# Altium PCB robotcar.PcbDoc (part 1 of 3)
Units mil, origin at the board's own origin, x right, y up, seen from the top; angles counter-clockwise.
Board outline 4050.03 x 1712.03 mil, 2 copper layers (Top Layer, Bottom Layer); 124 components, 123 nets, 485 pads, 136 vias.
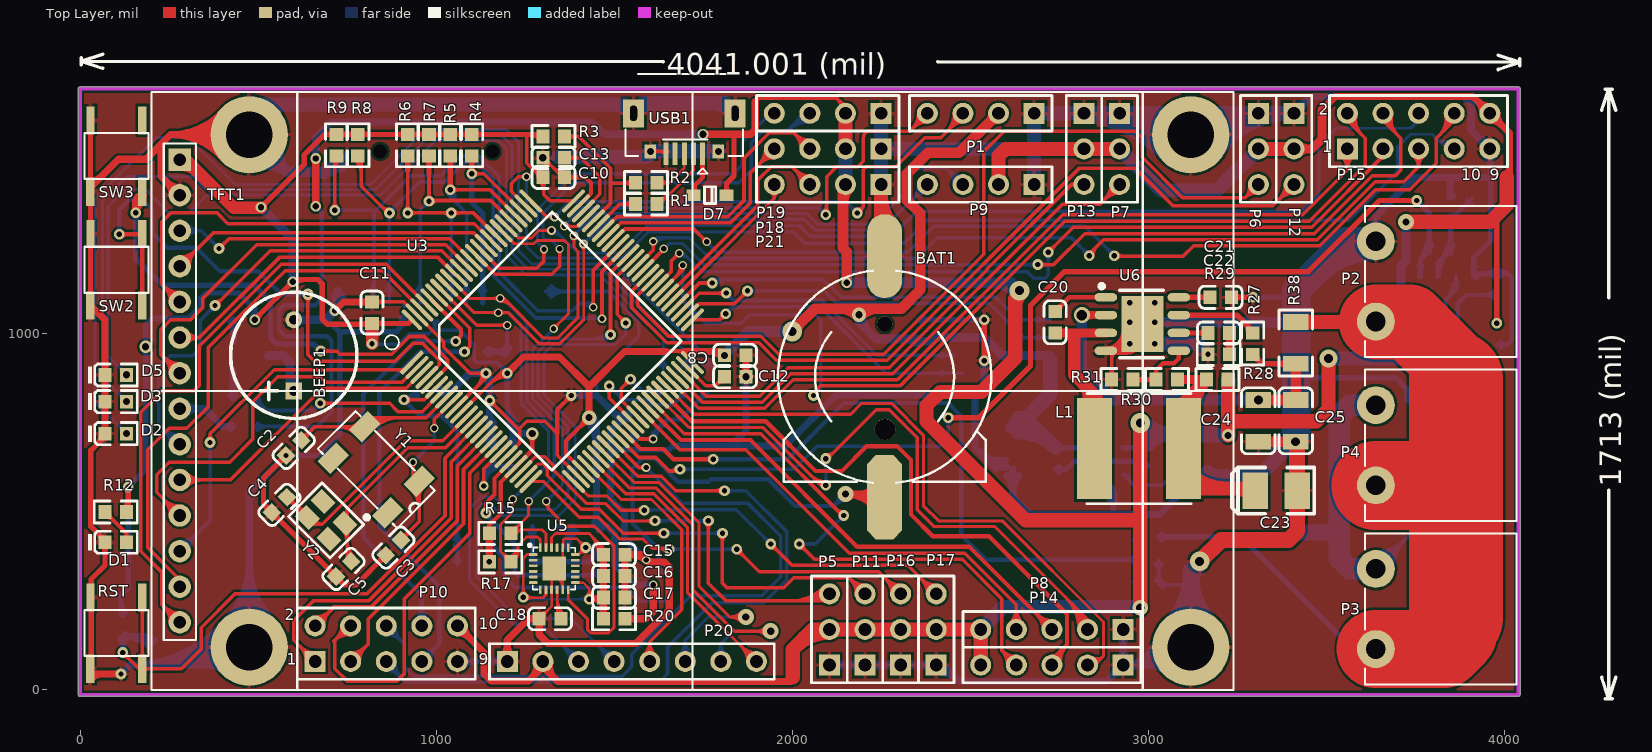
[diagram p0: Top Layer view]
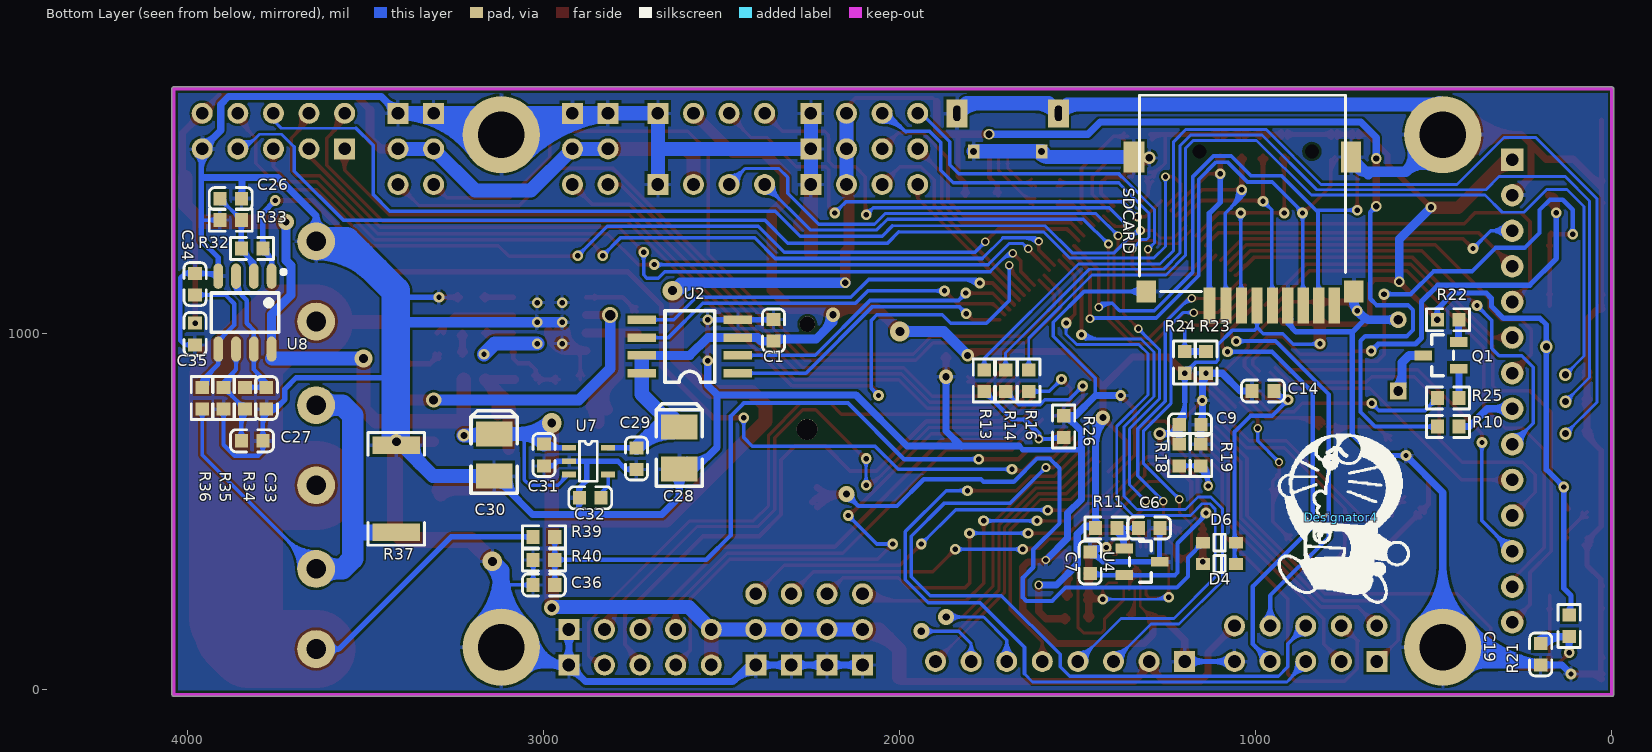
[diagram p1: Bottom Layer view, seen from below]

## Layer stack, top to bottom
Top Layer: signal copper 1.4
Dielectric: dielectric 12.6, FR-4, Dk 4.8
Bottom Layer: signal copper 1.4

## Board outline
-5.01,-13 ccw(c0,-13) 0,-18.02 4040,-18.02 ccw(c4040,-13) 4045.01,-13 4045.01,1689 ccw(c4040,1689) 4040,1694.02 0,1694.02 ccw(c0,1689) -5.01,1689

## Design rules (kind name [scope] priority, off if disabled: settings)
Clearance [All] p1: gap=7
ComponentClearance [All] p1: gap=10 collisioncheckmode=3 verticalgap=10
HoleSize [All] p1: absolutevalues=TRUE maxlimit=200 minlimit=7 maxpercent=80.000 minpercent=20.000
PolygonConnect [All] p1: connectstyle=Relief reliefconductorwidth=10 reliefentries=4 polygonreliefangle="90 Angle"
RoutingVias [All] p1: holewidth=10 width=20 viastyle="Through Hole" minholewidth=1 minwidth=2 maxholewidth=200 maxwidth=100
SolderMaskExpansion [All] p1: expansion=4
TestPointUsage [All] p1: valid=0 allowmultiple=FALSE
Testpoint [All] p1: side=15 testpointundercomponent=TRUE minsize=40 maxsize=100 preferedsize=60 minholesize=0 maxholesize=40 preferedholesize=32 testpointgrid=1 style=1023 order=0-112345678
Width [All] p1: maxlimit=500 minlimit=7 preferedwidth=10 minimp=50.000000 maximp=50.000000 favimp=50.000000
17 further rules are at their usual default settings.

## Classes and differential pairs
component class U_socket: P5 P6 P7 P8 P9 P10 P11 P12 P13 P14 P15 P16 P17 P18 P19 P20 P21
component class U_power: C20 C21 C22 C23 C24 C25 C26 C27 C28 C29 C30 C31 C32 C33 C34 C35 C36 L1 P2 P3 P4 R27 R28 R29 R30 R31 R32 R33 R34 R35 R36 R37 R38 R39 R40 U6 U7 U8
component class U_mcu: BAT1 BEEP1 C1 C2 C3 C4 C5 C6 C7 C8 C9 C10 C11 C12 C13 C14 C15 C16 C17 C18 C19 D1 D2 D3 D4 D5 D6 D7 P1 Q1 R1 R2 R3 R4 R5 R6 R7 R8 R9 R10 R11 R12 R13 R14 R15 R16 R17 R18 R19 R20 R21 R22 R23 R24 R25 R26 RST SDCARD SW2 SW3 TFT1 U2 U3 U4 U5 USB1 Y1 Y2

## Components (designator, comment, footprint, x,y, rotation, side; value= is the part's Value field where it differs from the comment)
BAT1 "BATT" BATM 2260,880 r0 top locked
BEEP1 "BEEP" BELL-5 600,840 r90 top
C1 "100nF (104) 10% 50V" 0603_C 2355,1010 r90 bottom
C2 "10pF" 0603_C 600,680 r45 top
C3 "10pF" 0603_C 880,400 r45 top
C4 "10pF" 0603_C 560,520 r45 top
C5 "10pF" 0603_C 740,340 r45 top
C6 "470nF" 0603_C 1300,455 r0 bottom
C7 "100nF" 0603_C 1465.59,357.87 r270 bottom
C8 "100nF (104) 10% 50V" 0603_C 1840,940 r0 top
C9 "100nF (104) 10% 50V" 0603_C 1185,745 r180 bottom
C10 "100nF (104) 10% 50V" 0603_C 1330,1440 r0 top
C11 "100nF (104) 10% 50V" 0603_C 820,1060 r90 top
C12 "100nF (104) 10% 50V" 0603_C 1840,880 r180 top
C13 "100nF (104) 10% 50V" 0603_C 1330,1495 r0 top
C14 "1uF (105) 10% 50V" 0603_C 980,840 r180 bottom
C15 "10uF" 0603_C 1500,380 r180 top
C16 "100nF" 0603_C 1500,320 r180 top
C17 "100nF" 0603_C 1500,260 r180 top
C18 "100nF" 0603_C 1320,200 r0 top
C19 "1uF (105) 10% 50V" 0603_C 200,100 r90 bottom
C20 "10nF" 0603_C 2739,1033 r270 top
C21 "100nF 50V" 0603_C 3204,1103 r180 top
C22 "3.3nF" 0603_C 3199,1003 r0 top
C23 "100uF" CASE-B_3528 3360,560 r180 top
C24 "10uF" 1206_C 3309.76,756.06 r90 top
C25 "10uF" 1206_C 3414.76,756.06 r90 top
C26 "100nF" 0603_C 3880,1380 r0 bottom
C27 "100nF" 0603_C 3820,700 r180 bottom
C28 "100uF (107) ±10% 6.3V" CASE-B_3528 2620,680 r90 bottom
C29 "100nF (104) 10% 50V" 0603_C 2740,650 r90 bottom
C30 "100uF (107) ±10% 6.3V" CASE-B_3528 3140,660 r90 bottom
C31 "100nF (104) 10% 50V" 0603_C 3000,660 r270 bottom
C32 "100nF (104) 10% 50V" 0603_C 2870,540 r180 bottom
C33 "100nF" 0603_C 3780,820 r90 bottom
C34 "100nF" 0603_C 3980,1140 r270 bottom
C35 "100nF" 0603_C 3980,1000 r270 bottom
C36 "100nF (104) 10% 50V" 0603_C 3000,295 r0 bottom
D1 "白灯 0603" 0603_LED_S1 100,415 r0 top
D2 "红灯 0603" 0603_LED_S1 100,720 r0 top
D3 "绿灯 0603" 0603_LED_S1 100,810 r0 top
D4 "1N4148WS T4" SOD-323 1102,354 r0 bottom
D5 "蓝灯 0603" 0603_LED_S1 100,885 r0 top
D6 "1N4148WS T4" SOD-323 1102,414 r0 bottom
D7 "1N4148WS T4" SOD-323 1770,1390 r180 top
Designator4 "Comment" jiqimao2 760,485 r180 bottom
L1 "10uH" L_SOP74 2849,678 r0 top
P1 "Header 4,SWD" HDR1X4 2680,1620 r180 top
P2 "Header 2" HT508R 3640,1260 r270 top
P3 "Header 2" HT508R 3640,340 r270 top locked
P4 "Header 2" HT508R 3640,800 r270 top locked
P5 "Header 3" HDR1X3 2105,70 r90 top
P6 "Header 3" HDR1X3 3310,1620 r270 top
P7 "Header 3" HDR1X3 2920,1620 r270 top
P8 "Header 5" HDR1X5 2930,170 r180 top
P9 "Header 4" HDR1X4 2680,1420 r180 top
P10 "Header 5X2" HDR2X5 660,80 r0 top locked
P11 "Header 3" HDR1X3 2205,70 r90 top
P12 "Header 3" HDR1X3 3410,1620 r270 top
P13 "Header 3" HDR1X3 2820,1620 r270 top
P14 "Header 5" HDR1X5 2930,70 r180 top
P15 "Header 5X2" HDR2X5 3560,1520 r0 top
P16 "Header 3" HDR1X3 2305,70 r90 top
P17 "Header 3" HDR1X3 2405,70 r90 top
P18 "Header 4" HDR1X4 2250,1520 r180 top
P19 "Header 4" HDR1X4 2250,1620 r180 top
P20 "Header 8" HDR1X8 1200,80 r0 top
P21 "Header 4" HDR1X4 2250,1420 r180 top
Q1 "SS8550 Y2" SOT-23(SOT-23-3) 480,940 r180 bottom
R1 "22Ω (22R0) ±1%" 0603_R 1590,1365 r180 top
R2 "22Ω (22R0) ±1%" 0603_R 1590,1425 r180 top
R3 "4.7KΩ (4701) ±1%" 0603_R 1330,1555 r0 top
R4 "10KΩ (1002) ±1%" 0603_R 1100,1530.31 r270 top
R5 "10KΩ (1002) ±1%" 0603_R 1040,1530.31 r270 top
R6 "10KΩ (1002) ±1%" 0603_R 920,1530.31 r270 top
R7 "10KΩ (1002) ±1%" 0603_R 980,1530.31 r270 top
R8 "10KΩ (1002) ±1%" 0603_R 780,1530.31 r270 top
R9 "10KΩ (1002) ±1%" 0603_R 720,1530.31 r270 top
R10 "100Ω" 0603_R 460,740 r180 bottom
R11 "0Ω" 0603_R 1420,455 r180 bottom
R12 "1.2KΩ (1201) ±1%" 0603_R 100,500 r0 top
R13 "1.2KΩ (1201) ±1%" 0603_R 1763,869 r270 bottom
R14 "1.2KΩ (1201) ±1%" 0603_R 1703,869 r270 bottom
R15 "10KΩ" 0603_R 1180,440 r0 top
R16 "1.2KΩ (1201) ±1%" 0603_R 1638,869 r270 bottom
R17 "10KΩ" 0603_R 1180,360 r0 top
R18 "0Ω (0R0) ±1%" 0603_R 1215,660 r270 bottom
R19 "0Ω (0R0) ±1%" 0603_R 1155,660 r270 bottom
R20 "10Ω (10R0) ±1%" 0603_R 1500,200 r0 top
R21 "10KΩ (1002) ±1%" 0603_R 120,180 r90 bottom
R22 "4.7Ω (4R70) ±1%" 0603_R 460,1040 r0 bottom
R23 "10KΩ (1002) ±1%" 0603_R 1140,920 r270 bottom
R24 "0Ω (0R0) ±1%" 0603_R 1200,920 r270 bottom
R25 "1.2KΩ (1201) ±1%" 0603_R 460,820 r180 bottom
R26 "10KΩ (1002) ±1%" 0603_R 1540,740 r90 bottom
R27 "100KΩ (1003) ±1%" 0603_R 3294,973 r270 top
R28 "0Ω (0R0) ±1%" 0603_R 3195,872 r0 top
R29 "6.8KΩ (6801) ±1%" 0603_R 3198.69,943 r180 top
R30 "47KΩ (4702) ±1%" 0603_R 3053,872 r0 top
R31 "10KΩ (1002) ±1%" 0603_R 2928,872 r0 top
R32 "20KΩ" 0603_R 3820,1240 r180 bottom
R33 "10KΩ" 0603_R 3880,1320 r0 bottom
R34 "91KΩ" 0603_R 3840,820 r270 bottom
R35 "10KΩ" 0603_R 3900,820 r90 bottom
R36 "1.2KΩ (1201) ±1%" 0603_R 3960,820 r270 bottom
R37 "0.01Ω" 2512_R 3415,565 r90 bottom
R38 "0Ω" 1206_R 3415,975 r90 top
R39 "33KΩ (3302) ±1%" 0603_R 3000,430 r0 bottom
R40 "10KΩ (1002) ±1%" 0603_R 3000,365 r180 bottom
RST "3*4 key" KEY-SMT 102,160 r270 top (schematic designator SW1)
SDCARD "SD" TF 1083.94,1076.54 r90 bottom locked (schematic designator CN1)
SW2 "3*4 key" KEY-SMT 102,1180 r270 top
SW3 "3*4 key" KEY-SMT 102,1500 r270 top
TFT1 "TFT 2.4'' module" "TFT 2.4'' module" 1720,840 r270 top locked
U2 "W25Q128" SOIC-8 2455,889.94 r0 bottom
U3 "STM32F103VC/ET6" LQFP-100 1326.08,979.85 r45 top locked
U4 "REF3125" SOT-23(SOT-23-3) 1320,360 r0 bottom
U5 "MPU9250" QFN24-t 1273.07,380.31 r0 top
U6 "MP2307" SOIC-8_EP_150mil 2984,1028 r270 top
U7 "SPX3819" SOT25-5 2930.24,680 r180 bottom
U8 "LM358" SOIC-8_150mil 3840,1060 r0 bottom
USB1 "USB-5P" USB-MICRO_B 1697.28,1620 r180 top locked
Y1 "32.768KHz" MC-306 832.01,618.9 r135 top
Y2 "25MHZ" SMD-3225_4P 691.07,476.37 r135 top

## Footprints (in the part's own frame and the unit in brackets; to place one, negate y for a bottom-side part, rotate by r counter-clockwise, add the part's x,y. Pads: shape width x height; smd on the part's side, far side on the other; paste and mask are expansions set on the pad)
0603_C [mm]
  rect 0.93x0.98 smd: 1(-0.77,0) 2(0.77,0)
  silkscreen extent -1.53,-0.79 1.54,0.79, body extent -0.8,-0.4 0.8,0.4, height 0.3
0603_LED_S1 [mm]
  rect 0.93x0.98 smd: A(0.77,0) K(-0.77,0)
  silkscreen extent -1.97,-0.79 1.54,0.79, body extent -0.8,-0.4 0.8,0.4, height 0.6
0603_R [mm]
  rect 0.93x0.98 smd: 1(-0.77,0) 2(0.77,0)
  silkscreen extent -1.53,-0.79 1.54,0.79, body extent -0.85,-0.4 0.85,0.4, height 0.56
1206_C [mm]
  rect 1.13x1.8 smd: 1(-1.49,0) 2(1.49,0)
  silkscreen extent -2.36,-1.2 2.35,1.2, body extent -1.6,-0.81 1.6,0.79, height 1
1206_R [mm]
  rect 1.13x1.8 smd: 1(-1.49,0) 2(1.49,0)
  silkscreen extent -2.36,-1.2 2.35,1.2, body extent -1.7,-0.86 1.65,0.87, height 0.85
2512_R [mm]
  rect 1.25x3.42 smd: 1(-3.1,0) 2(3.1,0)
  silkscreen extent -4.03,-2.01 4.02,2.01, body extent -3.16,-1.6 3.16,1.6, height 0.62
BATM [mm]
  round 1.1 hole 1.1 unplated: 0(0,3.748)
  round 1.5 hole 1.5 unplated: 0(0.025,-3.752)
  oct 2.5x6 smd: 1(0,-8.602)
  oval 2.5x6 smd: 2(0,8.598)
  silkscreen extent -7.62,-7.58 7.62,7.57
BELL-5 [mm]
  rect 1.2x1.2 hole 0.7: 1(0,0)
  round 1.2 hole 0.7: 2(5.08,0)
  silkscreen extent -1.97,-4.51 7.05,4.51
CASE-B_3528 [mm]
  rect 1.8x2.6 smd: 1(1.5,0) 2(-1.5,0)
  silkscreen extent -2.73,-1.65 3.16,1.65, body extent -1.85,-1.47 1.85,1.46, height 2.03
HDR1X3 [mm] "Connector; Header; 3 Position"
  rect 1.5x1.5 hole 0.9: 1(0,0)
  round 1.5 hole 0.9: 2(2.54,0) 3(5.08,0)
  silkscreen extent -1.27,-1.27 6.35,1.27
HDR1X4 [mm] "Connector; Header; 4 Position"
  rect 1.5x1.5 hole 0.9: 1(0,0)
  round 1.5 hole 0.9: 2(2.54,0) 3(5.08,0) 4(7.62,0)
  silkscreen extent -1.27,-1.27 8.89,1.27
HDR1X5 [mm] "Connector; Header; 5 Position"
  rect 1.5x1.5 hole 0.9: 1(0,0)
  round 1.5 hole 0.9: 2(2.54,0) 3(5.08,0) 4(7.62,0) 5(10.16,0)
  silkscreen extent -1.27,-1.27 11.43,1.27
HDR1X8 [mm] "Connector; Header; 8 Position"
  rect 1.5x1.5 hole 0.9: 1(0,0)
  round 1.5 hole 0.9: 2(2.54,0) 3(5.08,0) 4(7.62,0) 5(10.16,0) 6(12.7,0) 7(15.24,0) 8(17.78,0)
  silkscreen extent -1.27,-1.27 19.05,1.27
HDR2X5 [mm] "Connector; Header; 5x2 Position"
  rect 1.5x1.5 hole 0.9: 1(0,0)
  round 1.5 hole 0.9: 2(0,2.54) 3(2.54,0) 4(2.54,2.54) 5(5.08,0) 6(5.08,2.54) 7(7.62,0) 8(7.62,2.54) 9(10.16,0) 10(10.16,2.54)
  silkscreen extent -1.27,-1.27 11.43,3.81
HT508R [mm]
  round 2.7 hole 1.4: 1(0,0) 2(5.715,0)
  silkscreen extent -2.54,-0.76 8.25,10.03
jiqimao2 [mil]
  silkscreen extent -177,-240 190,232
KEY-SMT [mm]
  rect 2x0.6 smd: 1(-2.55,-1.85) 1(2.55,-1.87) 2(-2.55,1.85) 2(2.55,1.85)
  silkscreen extent -1.65,-2.29 1.65,2.29
L_SOP74 [mm]
  rect 2.5x7.2 smd: 1(0,0) 2(6.35,0)
  silkscreen extent -0.51,-3.94 6.89,3.94
LQFP-100 [mm]
  rect 2.2x0.3 smd: 1(-8.15,6)
  oval 2.2x0.3 smd: 2(-8.15,5.5) 3(-8.15,5) 4(-8.15,4.5) 5(-8.15,4) 6(-8.15,3.5) 7(-8.15,3) 8(-8.15,2.5) 9(-8.15,2) 10(-8.15,1.5) 11(-8.15,1) 12(-8.15,0.5) 13(-8.15,0) 14(-8.15,-0.5) 15(-8.15,-1) 16(-8.15,-1.5) 17(-8.15,-2) 18(-8.15,-2.5) 19(-8.15,-3) 20(-8.15,-3.5) 21(-8.15,-4) 22(-8.15,-4.5) 23(-8.15,-5) 24(-8.15,-5.5) 25(-8.15,-6) 51(8.15,-6) 52(8.15,-5.5) 53(8.15,-5) 54(8.15,-4.5) 55(8.15,-4) 56(8.15,-3.5) 57(8.15,-3) 58(8.15,-2.5) 59(8.15,-2) 60(8.15,-1.5) 61(8.15,-1) 62(8.15,-0.5) 63(8.15,0) 64(8.15,0.5) 65(8.15,1) 66(8.15,1.5) 67(8.15,2) 68(8.15,2.5) 69(8.15,3) 70(8.15,3.5) 71(8.15,4) 72(8.15,4.5) 73(8.15,5) 74(8.15,5.5) 75(8.15,6)
  oval 0.3x2.2 smd: 26(-6,-8.15) 27(-5.5,-8.15) 28(-5,-8.15) 29(-4.5,-8.15) 30(-4,-8.15) 31(-3.5,-8.15) 32(-3,-8.15) 33(-2.5,-8.15) 34(-2,-8.15) 35(-1.5,-8.15) 36(-1,-8.15) 37(-0.5,-8.15) 38(0,-8.15) 39(0.5,-8.15) 40(1,-8.15) 41(1.5,-8.15) 42(2,-8.15) 43(2.5,-8.15) 44(3,-8.15) 45(3.5,-8.15) 46(4,-8.15) 47(4.5,-8.15) 48(5,-8.15) 49(5.5,-8.15) 50(6,-8.15) 76(6,8.15) 77(5.5,8.15) 78(5,8.15) 79(4.5,8.15) 80(4,8.15) 81(3.5,8.15) 82(3,8.15) 83(2.5,8.15) 84(2,8.15) 85(1.5,8.15) 86(1,8.15) 87(0.5,8.15) 88(0,8.15) 89(-0.5,8.15) 90(-1,8.15) 91(-1.5,8.15) 92(-2,8.15) 93(-2.5,8.15) 94(-3,8.15) 95(-3.5,8.15) 96(-4,8.15) 97(-4.5,8.15) 98(-5,8.15) 99(-5.5,8.15)
  oval 0.3x1.95 smd: 100(-6,8.15)
  silkscreen extent -8.66,-6.51 6.51,8.54
MC-306 [mm]
  rect 1.3x1.9 smd: 1(-2.75,-1.6) 2(2.75,-1.6) 3(2.75,1.6) 4(-2.75,1.6)
  silkscreen extent -4,-1.9 4,1.9
QFN24-t [mm]
  rrect50% 0.6x0.2 smd: 1(0,0) 2(0,-0.4) 3(0,-0.8) 4(0,-1.2) 5(0,-1.6) 6(0,-2) 13(3,-2) 14(3,-1.6) 15(3,-1.2) 16(3,-0.8) 17(3,-0.4) 18(3,0)
  rrect50% 0.2x0.6 smd: 7(0.5,-2.5) 8(0.9,-2.5) 9(1.3,-2.5) 10(1.7,-2.5) 11(2.1,-2.5) 12(2.5,-2.5) 19(2.5,0.5) 20(2.1,0.5) 21(1.7,0.5) 22(1.3,0.5) 23(0.9,0.5) 24(0.5,0.5)
  rect 1.7x1.7 smd: 25(1.499,-1.003)
  silkscreen extent -0.36,-2.5 3,0.76
SMD-3225_4P [mm]
  rect 1.4x1.15 smd: 1(-1.1,-0.8) 2(1.1,-0.8) 3(1.1,0.8) 4(-1.1,0.8)
  silkscreen extent -2.1,-2.35 2.1,1.7, body extent -1.6,-1.25 1.6,1.25, height 0.61
SOD-323 [mm]
  rect 1x0.83 smd: 1(1.18,0) 2(-1.18,0)
  silkscreen extent -0.4,-0.6 0.4,0.6, body extent -1.35,-0.62 1.35,0.63, height 1.1
SOIC-8 [mil]
  rect 80x24 smd: 1(0,0) 2(0,-50.06) 3(0,-100.06) 4(0,-150.06) 5(270,-150) 6(270,-100) 7(270,-50) 8(270,0)
  silkscreen extent 65,-175 205,25
SOIC-8_150mil [mm]
  oval 0.7x1.8 smd: 1(-1.905,-2.6) 2(-0.635,-2.6) 3(0.635,-2.6) 4(1.905,-2.6) 5(1.905,2.6) 6(0.635,2.6) 7(-0.635,2.6) 8(-1.905,2.6)
  silkscreen extent -2.9,-3.05 2.4,1.4
SOIC-8_EP_150mil [mm]
  rect 4x3 smd: 0(0,0)
  oval 0.6x1.6 smd: 1(-1.905,-2.6) 2(-0.635,-2.6) 3(0.635,-2.6) 4(1.905,-2.6) 5(1.905,2.6) 6(0.635,2.6) 7(-0.635,2.6) 8(-1.905,2.6)
  silkscreen extent -2.85,-3.05 2.4,1.5
SOT25-5 [mm]
  rect 1x0.4 smd: 1(0,0) 2(0,-0.95) 3(0,-1.9) 4(2.8,-1.9) 5(2.8,0)
  silkscreen extent 0.76,-2.38 2.03,0.48
SOT-23(SOT-23-3) [mm]
  rect 1.25x0.7 smd: 1(1.25,-0.95) 2(1.25,0.95) 3(-1.25,0)
  silkscreen extent -0.65,-1.46 0.9,1.46, body extent -1.5,-1.5 1.5,1.5, height 1.3
TF [mm]
  rect 2.6x0.85 smd: 1(0.088,1.17)
  rect 2.6x0.8 smd: 2(0.088,0.002) 3(0.088,-1.101) 4(0.088,-2.204) 5(0.088,-3.307) 6(0.088,-4.411) 7(0.088,-5.514) 8(0.088,-6.617) 9(0.088,-7.72)
  round 0 hole 1: 11(11.088,1.88) 12(11.088,-6.12)
  rect 1.6x1.4 smd: G1(1.088,-9.12) G4(1.088,5.68)
  rect 2.2x1.5 smd: G2(10.688,6.58)
  rect 2.2x1.4 smd: G3(10.688,-8.92)
  silkscreen extent 1.09,-8.52 15.09,6.18
"TFT 2.4'' module" [mm] "带触摸液晶模块"
  round 5.5 hole 3.3: 0(-18.288,35.56) 0(-18.288,-31.623) 0(18.288,35.56) 0(18.288,-31.623)
  rect 1.6x1.6 hole 0.9: 1(-16.51,-36.576)
  round 1.6 hole 0.9: 2(-13.97,-36.576) 3(-11.43,-36.576) 4(-8.89,-36.576) 5(-6.35,-36.576) 6(-3.81,-36.576) 7(-1.27,-36.576) 8(1.27,-36.576) 9(3.81,-36.576) 10(6.35,-36.576) 11(8.89,-36.576) 12(11.43,-36.576) 13(13.97,-36.576) 14(16.51,-36.576)
  silkscreen extent -21.34,-38.61 21.34,38.61
USB-MICRO_B [mm] "micro型USB ，5.7*7.8*2.5mm"
  rect 0.35x1.6 smd: 1(-1.3,2.9) 2(-0.65,2.9) 3(0,2.9) 4(0.65,2.9) 5(1.3,2.9)
  rect 1.5x2 hole 0.5 slot 1.1 at 90 deg: 5(-3.625,0) 5(3.625,0)
  rect 0.8x1 hole 0.5: 5(-2.425,2.71) 5(2.425,2.71)
  silkscreen extent -4.19,-2.79 4.19,4.3, body extent -4,-2.71 4,2.89, height 2.8

## Part data
BAT1: library part BAT
C1 C7 C8 C9 C10 C11 C12 C13 C16 C17 C18 C21 C26 C27 C29 C31 C32 C33 C34 C35 C36: library part "0603 100nF (104) 10% 50V", "贴片电容"
C2 C3 C4 C5: library part "0603 10pF (100) 5% 50V", "贴片电容"
C6: library part "0603 470nF (474) 10% 25V", "贴片电容"
C14 C19: library part "0603 1uF (105) 10% 50V", "贴片电容"
C15: library part "0603 10uF (106) 10% 10V", "贴片电容"
C20: library part "0603 10nF (103) 10% 50V", "贴片电容"
C22: library part "0603 3.3nF (332) 10% 50V", "贴片电容"
C23 C28 C30: library part "3528 100uF (107) 10% 6.3V", "钽电容"
C24 C25: library part "1206 10uF (106) 10% 50V", "贴片电容"
D1: library part "0603 白灯", "发光二极管"
D2: library part "0603 红灯", "发光二极管"
D3: library part "0603 绿灯", "发光二极管"
D4 D6 D7: library part "SOD-323 1N4148WS T4", "二极管"
D5: library part "0603 蓝灯", "发光二极管"
L1: library part L_SOP
P1: library part "Header 4", "Header, 4-Pin"
P2 P3 P4: "Header, 2-Pin"
P5 P6 P7 P11 P12 P13 P16 P17: "Header, 3-Pin"
P8 P14: "Header, 5-Pin"
P9 P18 P19 P21: "Header, 4-Pin"
P10 P15: "Header, 5-Pin, Dual row"
P20: "Header, 8-Pin"
Q1: library part "SOT-23 SS8550 Y2", "三极管"
R1 R2: library part "0603 22Ω (22R0) 1%", "贴片电阻"
R3: library part "0603 4.7KΩ (4701) 1%", "贴片电阻"
R4 R5 R6 R7 R8 R9 R15 R17 R21 R23 R26 R31 R33 R35 R40: library part "0603 10KΩ (1002) 1%", "贴片电阻"
R10: library part "0603 100Ω (1000) 1%", "贴片电阻"
R11 R18 R19 R24 R28: library part "0603 0Ω (0R0) 1%", "贴片电阻"
R12 R13 R14 R16 R25 R36: library part "0603 1.2KΩ (1201) 1%", "贴片电阻"
R20: library part "0603 10Ω (10R0) 1%", "贴片电阻"
R22: library part "0603 4.7Ω (4R70) 1%", "贴片电阻"
R27: library part "0603 100KΩ (1003) 1%", "贴片电阻"
R29: library part "0603 6.8KΩ (6801) 1%", "贴片电阻"
R30: library part "0603 47KΩ (4702) 1%", "贴片电阻"
R32: library part "0603 20KΩ (2002) 1%", "贴片电阻"
R34: library part "0603 91KΩ (9102) 1%", "贴片电阻"
R37: library part "1206 100Ω (1000) 1%", "贴片电阻"
R38: library part "1206 100Ω (1000) 1%", "自恢复保险丝"
R39: library part "0603 33KΩ (3302) 1%", "贴片电阻"
RST SW2 SW3: library part SW-PB_V, "SWITCH"
SDCARD: library part SMS016AFA5E
U2: library part W25X16, "W25X16;SST25VF016;MX25L1605"
U3: library part STM32F103VBH6
U4: "电压基准芯片"
U5: "9轴运动处理传感器"
U6: "DC-DC降压芯片"
USB1: "微型USB母座"
Y1: library part XTAL, "Crystal Oscillator"
Y2: library part "SMD-3225_4P  25MHZ 12PF 10PPM", "贴片晶振"

## Via types
v1: diameter 30, hole 15, Top Layer to Bottom Layer, 73 vias
v2: diameter 23.62, hole 15, Top Layer to Bottom Layer, 11 vias
v3: diameter 35, hole 20, Top Layer to Bottom Layer, 8 vias
v4: diameter 24, hole 15, Top Layer to Bottom Layer, 7 vias
v5: diameter 25, hole 15, Top Layer to Bottom Layer, 7 vias
v6: diameter 30, hole 18, Top Layer to Bottom Layer, 6 vias
v7: diameter 45, hole 20, Top Layer to Bottom Layer, 4 vias
v8: diameter 55, hole 25, Top Layer to Bottom Layer, 4 vias
v9: diameter 43, hole 25, Top Layer to Bottom Layer, 3 vias
v10: diameter 40, hole 20, Top Layer to Bottom Layer, 3 vias
v11: diameter 23, hole 15, Top Layer to Bottom Layer, 3 vias
v12: diameter 32, hole 16, Top Layer to Bottom Layer, 1 vias
v13: diameter 30, hole 20, Top Layer to Bottom Layer, 1 vias
v14: diameter 50, hole 25, Top Layer to Bottom Layer, 1 vias
v15: diameter 27.56, hole 15, Top Layer to Bottom Layer, 1 vias
v16: diameter 25, hole 16, Top Layer to Bottom Layer, 1 vias
v17: diameter 45, hole 30, Top Layer to Bottom Layer, 1 vias
v18: diameter 30, hole 16, Top Layer to Bottom Layer, 1 vias

## Nets (pads, with @x,y where several pads share a name; then routed paths per layer and width w, separated by ;. In a path a pad name is that pad's centre, name@x,y a point inside that pad or via, vN(x,y) a via of type N, cw(c..) or ccw(c..) an arc to the next point about the centre after c; other vN are vias at no path point)
AMP1: C33.2 R34.1 U8.3 U8.7 | length 705.2
  Bottom Layer w12: C33.2@3781.29,850.31 cw(c3819.86,850.31) 3792.59,877.59 ; C33.2@3789.69,841.61 cw(c3810.7,820.6) 3810.7,850.31 cw(c3810.7,880.03) C33.2@3789.69,859.02 ; C33.2@3793.29,850.31 cw(c3860.83,850.31) 3813.07,898.07 ; U8.7@3809.5,930.48 cw(c3796.22,917.2) 3815,917.2 cw(c3833.78,917.2) U8.7@3820.5,930.48 ; U8.7@3809.5,984.79 ccw(c3796.22,998.07) 3815,998.07 ccw(c3833.78,998.07) U8.7@3820.5,984.79 ; R34.1@3830.31,841.61 ccw(c3809.3,820.6) 3809.3,850.31 ccw(c3809.3,880.03) R34.1@3830.31,859.02 ; R34.1@3840,850.31 C33.2@3780,850.31 3780,865 3815,900 U8.7@3815,957.64 3815,1010 3835,1030 3835,1095 3865,1125 U8.3@3865,1162.36 ; 3842.86,1102.86 ccw(c3807.99,1137.72) U8.3@3857.23,1140.3 ; 3861.92,1121.92 ccw(c3844.21,1139.62) U8.3@3869.21,1140.93
BEEP: R25.1 U3.7 | length 673.5
  Top Layer w10: v1(675,805) 870,805 893,782 961.19,782 U3.7@997.1,817.9 ; v1@682.07,797.93 cw(c699.14,780.86) 699.14,805 cw(c699.14,829.14) v1@682.07,812.07
  Bottom Layer w10: R25.1@490.31,805.71 cw(c490.31,771.97) 514.17,795.83 ; R25.1@495,815 525,785 655,785 v1(675,805) ; R25.1@503.62,819.02 ccw(c534.13,819.02) 512.56,797.44 ; v1@665,805 cw(c640.86,805) 657.93,787.93 cw(c675,770.86) v1@675,795
BOOT0: R23.1 R24.1 U3.94 | length 526.3
  Top Layer w10: U3.94@1015.68,1123.22 1113.9,1025 v4(1200,1025) ; v4@1195.05,1020.05 ccw(c1183.1,1008.1) 1183.1,1025 ccw(c1183.1,1041.9) v4@1195.05,1029.95
  Bottom Layer w10: R24.1@1190.59,959.72 ccw(c1167.87,982.44) 1200,982.44 ccw(c1232.13,982.44) R24.1@1209.41,959.72 ; v4@1195.05,1020.05 cw(c1183.1,1008.1) 1200,1008.1 cw(c1216.9,1008.1) v4@1204.95,1020.05 ; R24.1@1200,950.31 v4(1200,1025)
  Bottom Layer w20: R23.1@1140,950.31 R24.1@1200,950.31 ; R23.1@1146.86,944.44 cw(c1161.04,930.26) 1161.04,950.31 cw(c1161.04,970.37) R23.1@1146.86,956.19 ; R24.1@1193.14,944.44 ccw(c1178.96,930.26) 1178.96,950.31 ccw(c1178.96,970.37) R24.1@1193.14,956.19
BOOT1: R13.2 R26.1 U3.37 | length 555.5
  Top Layer w12: U3.37@1539.05,739.05 1573.1,705 v5(1610,705) ; v5@1605.4,700.4 ccw(c1594.31,689.31) 1594.31,705 ccw(c1594.31,720.69) v5@1605.4,709.6
  Bottom Layer w12: R26.1@1544.69,705 v5(1610,705) v5@1605.31,709.69 ; R26.1@1549.69,700.98 cw(c1559.39,691.28) 1559.39,705 ; R26.1@1549.69,718.39 ccw(c1582.01,750.71) 1582.01,705 ; v5@1605.4,700.4 ccw(c1594.31,689.31) 1594.31,705 ccw(c1594.31,720.69) v5@1605.4,709.6 ; 1649.68,760 1684.32,760 R13.2@1763,838.68 ; 1740.31,816 ccw(c1717.62,838.68) R13.2@1749.71,838.68 ; 1742.69,818.37 cw(c1762.02,799.04) R13.2@1762.02,826.38
  Bottom Layer w15: v5(1610,705) 1610,720.32 1649.68,760 ; v5@1615,705 cw(c1664.05,705) 1629.37,739.68
GND: BAT1.2 BEEP1.2 C1.2 C2.1 C3.1 C4.1 C5.1 C6.1 C7.1 C8.2 C9.2 C10.2 C11.2 C12.1 C13.1 C14.1 C15.1 C16.1 C17.1 C18.1 C19.1 C21.1 C23.2 C24.1 C25.1 C26.1 C27.2 C28.2 C29.1 C30.2 C31.2 C32.1 C33.1 C34.1 C35.2 C36.2 D1.K D2.K D3.K D5.K P1.1 P2.1 P5.1 P6.1 P7.1 P8.1 P9.1 P10.9 P11.1 P12.1 P13.1 P14.1 P15.9 P16.1 P17.1 P18.1 P19.1 P20.1 P21.1 R19.1 R23.2 R26.2 R29.2 R31.1 R33.2 R35.1 R37.2 R40.1 RST.1 SDCARD.6 SDCARD.G1 SDCARD.G2 SDCARD.G3 SDCARD.G4 SW2.1 SW3.1 TFT1.0 TFT1.2 U2.4 U3.10 U3.20 U3.27 U3.74 U3.99 U4.3 U5.9 U5.11 U5.18 U5.20 U5.25 U6.0 U6.4 U7.2 U8.4 USB1.5 | length 36141.1
  Top Layer w7: C18.1@1289.68,200 1324.25,234.57 1324.25,333 1355.75,364.49 U5.20@1355.75,400 1357.06,401.31 1357.06,422.06 1360,425 1395,425 v1(1420,400) ; C18.1@1289.68,208.79 ccw(c1289.68,230.02) C18.1@1304.69,215.01 ; C18.1@1289.68,215.79 ccw(c1289.68,253.91) 1316.64,226.96 ; C18.1@1304.49,200.98 cw(c1337.86,200.98) 1314.27,224.58 ; U5.20@1355.44,408.18 ccw(c1351.53,412.09) 1357.06,412.09 ; v1@1408.5,400 ccw(c1380.74,400) 1400.37,419.63 ccw(c1420,439.26) v1@1420,411.5
  Top Layer w8: U5.25@1328.29,319.69 cw(c1322.41,286.87) U5.11@1355.75,286.87 ; U5.25@1329.7,327.56 cw(c1324.12,296.43) 1355.75,296.43 ; U5.25@1331.11,335.44 cw(c1325.84,305.99) 1355.75,305.99 ; U5.25@1332.52,343.31 cw(c1327.55,315.55) U5.25@1355.75,315.55 ; U5.11@1355.75,281.89 U5.25@1355.75,317.14 ; U5.18@1391.18,380.31 1400.32,380.31 v1(1420,400) ; v1@1409,400 cw(c1382.44,400) 1401.22,381.22 cw(c1420,362.44) v1@1420,389
  Top Layer w10: SW2.1@28.38,1079.61 SW2.1@29.17,1080.39 ; C11.2@820,1090.31 909.39,1090.31 1021.92,977.79 1021.92,963.08 1095.32,889.68 v1(1140,889.68) ; C11.2@830.39,1080.91 cw(c853.11,1058.19) 853.11,1090.31 cw(c853.11,1122.44) C11.2@830.39,1099.72 ; U3.10@1057.44,794.73 1140,877.29 v1(1140,889.68) ; 1114.16,851.45 ccw(c1075.93,889.68) v1@1130,889.68 ; 1131.24,868.52 ccw(c1110.07,889.68) v1(1140,889.68) ; v1@1132.93,882.61 ccw(c1115.86,865.54) 1115.86,889.68 ccw(c1115.86,913.83) v1@1132.93,896.76 ; v1@1151,803 cw(c1151,778.86) 1168.07,795.93 cw(c1185.14,813) v1@1161,813 ; v1(1151,813) 1235,729 ; U3.20@1196.63,655.53 1235,693.9 1235,735 1255,755 1305,755 1340,720 1340,659.71 U3.27@1399.85,599.85 ; C13.1@1299.68,1480.71 cw(c1299.68,1443.03) 1326.33,1469.67 ; C13.1@1299.68,1482.5 cw(c1299.68,1449.15) 1323.27,1472.73 ; C13.1@1312,1484 1356,1440 C10.2@1360.32,1440 ; C13.1@1312.18,1495 ccw(c1339.19,1495) 1320.09,1475.91 ; C13.1@1312.99,1494.02 ccw(c1339.57,1494.02) 1320.78,1475.22 ; 1328.55,1467.45 ccw(c1360.32,1499.21) C10.2@1360.32,1454.29 ; 1341.35,1454.65 cw(c1327.68,1440.98) C10.2@1347.01,1440.98 ; USB1.5@1601.81,1513.31 USB1.5@1646.1,1513.31 ; USB1.5@1609.41,1505.71 cw(c1627.76,1487.36) 1627.76,1513.31 cw(c1627.76,1539.26) USB1.5@1609.41,1520.91 ; 1623.48,1513.31 cw(c1623.48,1483.21) USB1.5@1644.77,1504.49 ; USB1.5@1647.62,1513.31 cw(c1647.62,1507.35) USB1.5@1651.84,1511.56 ; R31.1@2888.28,882.39 ccw(c2865.56,905.11) 2897.69,905.11 ccw(c2929.81,905.11) R31.1@2907.09,882.39 ; R31.1@2897.69,872 U6.4@2897.69,953 ; 2897.69,927.77 cw(c2926.55,927.77) U6.4@2906.14,948.18
  Top Layer w12: 1340,720 1340,787 v1(1380,827) ; C10.2@1369.02,1431.3 cw(c1390.03,1410.29) 1390.03,1440 cw(c1390.03,1469.71) C10.2@1369.02,1448.7 ; v1@1371,827 cw(c1349.27,827) 1364.64,811.64 cw(c1380,796.27) v1@1380,818 ; C10.2@1371.38,1434.61 cw(c1380,1430.41) 1380,1440 ; C10.2@1371.38,1445.39 ccw(c1380,1449.59) 1380,1440 ; U3.74@1399.85,1359.85 1435,1395 1435,1425 1420,1440 1380,1440 ; USB1.5@1646.1,1505.83 USB1.5@1646.1,1513.31
  Top Layer w15: RST.1@25.33,90.21 ccw(c11.64,103.9) 31,103.9 ; SW2.1@25.33,1110.21 ccw(c16.07,1119.48) 29.17,1119.48 ; SW3.1@25.33,1369 cw(c16.07,1359.74) 29.17,1359.74 ; SW3.1@25.33,1430.21 ccw(c16.07,1439.48) 29.17,1439.48 ; RST.1@26.12,229.79 cw(c14.33,218) 31,218 ; RST.1@26.12,291 ccw(c14.33,302.79) 31,302.79 ; SW2.1@29.17,1080.39 SW3.1@29.17,1600.39 ; RST.1@31,51 31,311 69.69,349.69 69.69,420 30,459.69 30,673 D2.K@75,718 ; 46.76,689.76 ccw(c17.5,719.02) D2.K@58.88,719.02 ; 48.4,441.29 cw(c23.09,415.98) D1.K@58.88,415.98 ; D1.K@58.09,431.59 ccw(c69.69,443.19) D1.K@69.69,426.79 ; D1.K@62.04,406.37 cw(c43.59,387.93) 69.69,387.93 cw(c95.78,387.93) D1.K@77.33,406.37 ; C4.1@527.06,499.26 ccw(c500.97,499.26) 519.42,517.71 ccw(c537.87,536.16) C4.1@537.87,510.07 ; C4.1@539.26,487.06 cw(c539.26,460.97) 557.71,479.42 cw(c576.16,497.87) C4.1@550.07,497.87 ; C2.1@567.76,658.56 cw(c541.67,658.56) 560.12,640.12 cw(c578.56,621.67) C2.1@578.56,647.76 ; C2.1@571.06,658.56 cw(c552.96,658.56) 565.76,645.76 cw(c578.56,632.96) C2.1@578.56,651.06 ; v1(578.56,658.56) 515,595 515,522.13 742.13,295 775,295 C3.1@858.56,378.56 ; C5.1@707.06,319.26 ccw(c680.97,319.26) 699.42,337.71 ccw(c717.87,356.16) C5.1@717.87,330.07 ; C5.1@719.26,307.06 cw(c719.26,280.97) 737.71,299.42 cw(c756.16,317.87) C5.1@730.07,317.87 ; C3.1@847.76,378.56 cw(c821.67,378.56) 840.12,360.12 cw(c858.56,341.67) C3.1@858.56,367.76 ; v1@2534.7,930.3 ccw(c2521.89,943.11) 2540,943.11 ccw(c2558.11,943.11) v1@2545.3,930.3 ; v1@2534.7,1034.7 cw(c2521.89,1021.89) 2540,1021.89 cw(c2558.11,1021.89) v1@2545.3,1034.7 ; v1(2540,925) v1(2540,1040) ; C21.1@3234.32,1103 v1(3295,1103) ; C21.1@3241.96,1095.36 cw(c3260.41,1076.91) 3260.41,1103 cw(c3260.41,1129.09) C21.1@3241.96,1110.64 ; v1@3289.7,1097.7 ccw(c3276.89,1084.89) 3276.89,1103 ccw(c3276.89,1121.11) v1@3289.7,1108.3
  Top Layer w20: RST.1@28,45 v1(115,45) ; SW2.1@28.38,1070.24 cw(c28.38,1043.81) 47.06,1062.5 ; SW3.1@28.38,1428.98 ccw(c28.38,1471.46) 58.42,1441.42 ; SW2.1@29.17,1080.39 69.69,1039.87 D2.K@69.69,720 ; RST.1@29.66,30.77 cw(c64.02,-3.6) 64.02,45 ; SW3.1@32,1415 108,1491 185,1491 254,1560 ; D2.K@63.81,726.86 ccw(c49.63,741.04) 69.69,741.04 ccw(c89.74,741.04) D2.K@75.56,726.86 ; D3.K@63.81,803.14 cw(c49.63,788.96) 69.69,788.96 cw(c89.74,788.96) D3.K@75.56,803.14 ; D3.K@63.81,816.86 ccw(c49.63,831.04) 69.69,831.04 ccw(c89.74,831.04) D3.K@75.56,816.86 ; D5.K@63.81,878.14 cw(c49.63,863.96) 69.69,863.96 cw(c89.74,863.96) D5.K@75.56,878.14 ; D5.K@63.81,891.86 ccw(c49.63,906.04) 69.69,906.04 ccw(c89.74,906.04) D5.K@75.56,891.86 ; 227,1533 227,1443 TFT1.2@280,1390 ; TFT1.2@258.5,1390 ccw(c206.61,1390) 243.3,1426.7 ccw(c280,1463.39) TFT1.2@280,1411.5 ; TFT1.0@402.03,1494.18 ccw(c254.01,1360.65) 254.01,1560 ; TFT1.0@402.03,1625.82 cw(c254.01,1759.35) 254.01,1560 ; TFT1.0@416.88,1507.57 ccw(c298.99,1401.22) 298.99,1560 ccw(c298.99,1718.78) TFT1.0@416.88,1612.43 ; TFT1.0@431.73,1520.97 ccw(c343.97,1441.8) 343.97,1560 ccw(c343.97,1678.2) TFT1.0@431.73,1599.03 ; TFT1.0@475,1560 254,1560 ; v1(715,1065) 740.32,1090.31 C11.2@820,1090.31 ; C11.2@813.14,1084.44 ccw(c798.96,1070.26) 798.96,1090.31 ccw(c798.96,1110.37) C11.2@813.14,1096.19 ; P20.1@1186.19,93.81 ccw(c1152.86,127.14) 1200,127.14 ccw(c1247.14,127.14) P20.1@1213.81,93.81 ; P20.1@1200,70 1200,140 1260,200 C18.1@1289.68,200 1289.68,155.31 1315,130 1560,130 1655,225 1655,345 1640,360 1595,360 1575,380 C15.1@1530.32,380 C17.1@1530.32,260 ; C18.1@1283.81,193.14 cw(c1269.63,178.96) 1289.68,178.96 cw(c1309.74,178.96) C18.1@1295.56,193.14 ; C18.1@1283.81,194.13 ccw(c1269.63,179.94) 1269.63,200 ccw(c1269.63,220.06) C18.1@1283.81,205.87 ; C17.1@1524.44,266.86 ccw(c1510.26,281.04) 1530.31,281.04 ccw(c1550.37,281.04) C17.1@1536.19,266.86 ; C16.1@1524.44,313.14 cw(c1510.26,298.96) 1530.31,298.96 cw(c1550.37,298.96) C16.1@1536.19,313.14 ; C16.1@1524.44,326.86 ccw(c1510.26,341.04) 1530.31,341.04 ccw(c1550.37,341.04) C16.1@1536.19,326.86 ; C15.1@1524.44,373.14 cw(c1510.26,358.96) 1530.31,358.96 cw(c1550.37,358.96) C15.1@1536.19,373.14 ; C15.1@1536.19,374.13 cw(c1550.37,359.94) 1550.37,380 cw(c1550.37,400.06) C15.1@1536.19,385.87 ; 1549.41,380 cw(c1549.41,324.41) v2@1588.72,363.72 ; v2@1591.28,366.28 ccw(c1606.44,381.44) 1606.44,360 ; C12.1@1863.24,887.07 ccw(c1846.17,904.14) 1870.31,904.14 ccw(c1894.46,904.14) C12.1@1877.39,887.07 ; C12.1@1864.44,886.86 ccw(c1850.26,901.04) 1870.31,901.04 ccw(c1890.37,901.04) C12.1@1876.19,886.86 ; C8.2@1864.44,933.14 cw(c1850.26,918.96) 1870.31,918.96 cw(c1890.37,918.96) C8.2@1876.19,933.14 ; v10(1870.32,880) C8.2@1870.32,940
  Top Layer w25: U6.4@2906.76,953 ccw(c2906.76,1008.69) U6.0@2962.45,1008.42 ; U6.0@2931.88,953 ccw(c2931.88,1008.57) U6.0@2987.44,1008.3 ; U6.0@2937.45,1008.54 cw(c2881.64,1008.81) U6.4@2881.64,953 2929,953 v1(2949,973)
  Top Layer w30: C24.1@3309.76,697.4 v9(3414.76,697.4)
  Top Layer w40: BAT1.2@2250,1228.52 P21.1@2250,1420 ; 2250,1382.08 ccw(c2354.67,1382.08) BAT1.2@2280.66,1308.07
  Top Layer w45: v8(3145,361) 3205,421 3394,421 3419.06,446.06 C25.1@3419.06,693.1
  Bottom Layer w10: SDCARD.G4@1307.56,1119.37 1482.81,1119.37 1569,1033.18 1569,994 1451,876 1451,827 ; SDCARD.G4@1316.44,1110.49 cw(c1337.88,1089.05) 1337.88,1119.37 cw(c1337.88,1149.69) SDCARD.G4@1316.44,1128.25 ; SDCARD.G4@1323.51,1103.42 cw(c1362.02,1064.91) 1362.02,1119.37 cw(c1362.02,1173.83) SDCARD.G4@1323.51,1135.32 ; C36.2@3020.91,305.39 ccw(c2998.19,328.11) 3030.31,328.11 ccw(c3062.44,328.11) C36.2@3039.72,305.39 ; R40.1@3020.91,354.61 cw(c2998.19,331.89) 3030.31,331.89 cw(c3062.44,331.89) R40.1@3039.72,354.61 ; R40.1@3030.31,365 C36.2@3030.32,295 3111,295 3112,296 ; C36.2@3039.72,285.59 cw(c3062.44,262.87) 3062.44,295 cw(c3062.44,327.13) C36.2@3039.72,304.41 ; R33.2@3910.32,1320 3963,1320 ; R33.2@3919.72,1310.59 cw(c3942.44,1287.87) 3942.44,1320 cw(c3942.44,1352.13) R33.2@3919.72,1329.41
  Bottom Layer w12: 685,1040 695,1040 ; SDCARD.6@910,1079.71 SDCARD.6@910.29,1080 ; C33.1@3772.28,780.98 cw(c3730.27,738.97) 3789.69,738.97 ; C33.1@3780.77,789.47 cw(c3759.24,767.94) 3789.68,767.94 ; C27.2@3780.98,709.69 ccw(c3759.97,730.7) 3789.68,730.7 ccw(c3819.4,730.7) C27.2@3798.39,709.69 ; C27.2@3781.44,689.88 cw(c3764.67,671.32) 3789.68,671.32 ; C33.1@3789.68,779.37 3789.68,671.31 ; C27.2@3797.93,689.88 ccw(c3814.7,671.32) 3789.68,671.32 ; R35.1@3891.3,780.98 cw(c3870.29,759.97) 3900,759.97 cw(c3929.71,759.97) R35.1@3908.7,780.98 ; R35.1@3900,789.69 3900,689 3869,658 3803,658 3789.68,671.31 ; C35.2@3980,969.69 4009.68,969.69 ; C35.2@3989.9,961.2 cw(c4009.68,942.38) 4009.68,969.69 ; C35.2@3989.9,978.17 ccw(c4009.68,996.99) 4009.68,969.68 ; 4009.68,1170.31 4022,1158 4022,982 4009.68,969.69
  Bottom Layer w15: v1(578.56,658.56) 670.56,658.56 729,717 729,1006 ; v1@583.87,653.26 cw(c596.67,640.46) 596.67,658.56 cw(c596.67,676.67) v1@583.87,663.87 ; 695,1040 729,1006 ; 894.64,1013.64 ccw(c873.6,1034.67) SDCARD.6@902.33,1042.42 ; SDCARD.6@910,1060 910,1029 887,1006 729,1006 ; P10.9@1060,80 P20.1@1200,80 ; P10.9@1075.58,64.42 cw(c1113.18,26.82) 1113.18,80 cw(c1113.18,133.18) P10.9@1075.58,95.58 ; P20.1@1184.42,64.42 ccw(c1146.82,26.82) 1146.82,80 ccw(c1146.82,133.18) P20.1@1184.42,95.58 ; C6.1@1262.04,446.37 cw(c1240.93,425.26) 1270.79,425.26 ; U4.3@1266.35,364.44 ccw(c1255.63,375.16) 1270.79,375.16 ccw(c1285.95,375.16) U4.3@1275.23,364.44 ; 1270.79,430.59 cw(c1293.11,430.59) C6.1@1277.33,446.37 ; C6.1@1270.79,458.9 U4.3@1270.79,360 1430,360 C7.1@1458.19,388.19 ; U4.3@1286.05,355.56 cw(c1296.77,344.84) 1296.77,360 cw(c1296.77,375.16) U4.3@1286.05,364.44 ; v1@1425.3,394.7 cw(c1438.11,381.89) 1438.11,400 cw(c1438.11,418.11) v1@1425.3,405.3 ; 1435.2,365.2 cw(c1464.61,335.8) C7.1@1464.61,377.38 ; C7.1@1449.58,400 cw(c1449.58,377.18) C7.1@1467.99,390.67 ; C7.1@1455.89,381.8 ccw(c1420,355.52) v1(1420,400) 1446.38,400 C7.1@1458.19,388.19 ; C7.1@1465.59,388.19 C7.1@1458.19,388.19 ; 1490.32,675 1655,675 1665,685 ; C1.2@2355,1040.31 U2.4@2454.68,1040.31 ; C1.2@2363.63,1032.67 cw(c2382.07,1014.22) 2382.07,1040.32 cw(c2382.07,1066.41) C1.2@2363.63,1047.96 ; U2.4@2455,1040 v1@2535,1040 ; v1@2534.7,1034.7 ccw(c2521.89,1021.89) 2521.89,1040 ccw(c2521.89,1058.11) v1@2534.7,1045.3 ; C29.1@2740,619.69 2769.68,619.69 2792.6,642.6 2962.4,642.6 2975.32,629.69 ; C29.1@2748.63,612.04 cw(c2767.07,593.59) 2767.07,619.69 cw(c2767.07,645.78) C29.1@2748.63,627.33 ; 2880,642.6 2880,588 2902,566 ; 2890.41,577.59 cw(c2856.2,543.39) C32.1@2904.5,540.76 ; C32.1@2892.67,531.37 cw(c2870.16,508.86) 2902,508.86 ; C32.1@2893.82,549.62 ccw(c2881.52,566) 2902,566 ; 2902,493 2902,566 ; 2902,516.99 cw(c2922.34,516.99) C32.1@2907.96,531.37 ; 2902,563.01 ccw(c2922.34,563.01) C32.1@2907.96,548.63 ; C31.2@2990.86,622.6 ccw(c2975.32,609.1) 2975.32,629.68 ; C31.2@2990.86,636.77 cw(c2975.32,650.27) 2975.32,629.69 ; C31.2@3000,629.69 2975.32,629.69 ; v1(3295,1103) 3398,1103 ; v1@3300.3,1097.7 cw(c3313.11,1084.89) 3313.11,1103 cw(c3313.11,1121.11) v1@3300.3,1108.3 ; 3416,877 3696,877 3728,845 3728,816 3754.32,789.69 ; 3740.35,803.65 ccw(c3760.02,823.32) C33.1@3773.7,799.1 ; C33.1@3771.08,782.35 ccw(c3754.32,766.86) 3754.32,789.69 ; C33.1@3771.08,797.02 cw(c3754.32,812.51) 3754.32,789.69 ; C33.1@3780,789.69 3754.32,789.69 ; C33.1@3781.08,786.03 cw(c3770.1,805.48) 3754.31,789.69 ; U8.4@3910.56,1188.46 ccw(c3899.84,1199.18) 3915,1199.18 ccw(c3930.16,1199.18) U8.4@3919.44,1188.46 ; U8.4@3915,1162.36 3915,1215 3963,1263 3963,1505.32 P15.9@3950.32,1518 ; U8.4@3919.44,1157.92 cw(c3948.6,1128.76) 3948.6,1170 ; U8.4@3922.64,1170 3979.68,1170 C34.1@3980,1170.31 4009.68,1170.31 ; P15.9@3944.42,1504.42 cw(c3899.58,1459.58) 3963,1459.58 ; 3952.16,1170 ccw(c3952.16,1197.17) C34.1@3971.37,1177.96 ; 3953.69,1170 cw(c3953.69,1144.98) C34.1@3971.37,1162.67 ; 3963,1474.06 cw(c4005.94,1474.06) P15.9@3975.58,1504.42 ; C34.1@3988.63,1162.67 cw(c4007.07,1144.22) 4007.07,1170.32 cw(c4007.07,1196.41) C34.1@3988.63,1177.96
  Bottom Layer w20: v1(115,45) 139.68,69.69 ; C19.1@184.84,69.68 ccw(c184.84,383.1) TFT1.0@417.02,172.57 ; C19.1@193.14,63.81 ccw(c178.96,49.63) 178.96,69.68 ccw(c178.96,89.74) C19.1@193.14,75.56 ; C19.1@206.86,63.81 cw(c221.04,49.63) 221.04,69.68 cw(c221.04,89.74) C19.1@206.86,75.56 ; 229.97,69.69 ccw(c229.97,342.18) TFT1.0@431.84,159.14 ; 275.1,69.68 ccw(c275.1,301.26) TFT1.0@446.65,145.71 ; 320.23,69.69 ccw(c320.23,260.33) TFT1.0@461.47,132.27 ; 359.23,69.68 cw(c359.23,4.23) TFT1.0@405.51,50.51 ; 365.37,69.69 ccw(c365.37,219.41) TFT1.0@476.28,118.84 ; TFT1.0@402.2,186.01 cw(c139.7,424.03) 139.7,69.68 ; TFT1.0@405,50 TFT1.0@475,120 475,555 v1(578.56,658.56) ; TFT1.0@405.51,189.49 ccw(c237.76,357.24) 475,357.24 ccw(c712.24,357.24) TFT1.0@544.49,189.49 ; TFT1.0@419.66,175.34 ccw(c286.05,308.95) 475,308.95 ccw(c663.95,308.95) TFT1.0@530.34,175.34 ; TFT1.0@424.68,69.69 139.68,69.69 ; TFT1.0@433.8,161.2 ccw(c334.33,260.67) 475,260.67 ccw(c615.67,260.67) TFT1.0@516.2,161.2 ; C14.1@1010.32,840 1045,840 1094.68,889.68 1120,889.68 ; C14.1@1016.19,834.13 cw(c1030.37,819.94) 1030.37,840 cw(c1030.37,860.06) C14.1@1016.19,845.87 ; R23.2@1133.14,883.81 ccw(c1118.96,869.63) 1118.96,889.68 ccw(c1118.96,909.74) R23.2@1133.14,895.56 ; R23.2@1135.11,883.81 cw(c1099.16,847.86) 1150,847.86 ; R23.2@1136.46,886.15 cw(c1103.79,853.47) 1150,853.47 ; v1(1140,889.68) 1150,879.68 1150,749.69 C9.2@1154.68,745 1154.68,690.63 R19.1@1155,690.31 ; C9.2@1148.81,738.14 cw(c1134.63,723.96) 1154.68,723.96 cw(c1174.74,723.96) C9.2@1160.56,738.14 ; R19.1@1149.13,696.19 ccw(c1135.71,709.61) 1154.69,709.61 ; 1150,777.35 ccw(c1186.05,777.35) C9.2@1160.56,751.86 ; 1154.68,711.13 ccw(c1175.82,711.13) R19.1@1160.87,696.19 ; v1(1380,827) 1451,827 1507.68,770.32 R26.2@1540,770.32 ; 1515.1,752.1 cw(c1539.02,728.19) R26.2@1539.02,762.01 ; R26.2@1533.14,764.44 ccw(c1518.96,750.26) 1518.96,770.32 ccw(c1518.96,790.37) R26.2@1533.14,776.19 ; R26.2@1533.32,770.32 1490.32,727.31 1490.32,535.42 1529,496.73 1529,426 v2(1590,365) ; 1665,685 1980,685 2124.12,829.12 2513.41,829.12 ; 1827.5,684.5 1870.32,727.31 v10(1870.32,880) ; v10@1863.24,872.93 cw(c1846.17,855.86) 1870.31,855.86 cw(c1894.46,855.86) v10@1877.39,872.93 ; P5.1@2105,70 2423.47,70 2470,23.47 2883.47,23.47 P14.1@2930,70 ; P5.1@2118.81,56.19 cw(c2152.14,22.86) 2152.14,70 cw(c2152.14,117.14) P5.1@2118.81,83.81 ; P11.1@2191.19,56.19 ccw(c2157.86,22.86) 2157.86,70 ccw(c2157.86,117.14) P11.1@2191.19,83.81 ; P11.1@2218.81,56.19 cw(c2252.14,22.86) 2252.14,70 cw(c2252.14,117.14) P11.1@2218.81,83.81 ; P16.1@2291.19,56.19 ccw(c2257.86,22.86) 2257.86,70 ccw(c2257.86,117.14) P16.1@2291.19,83.81 ; P16.1@2318.81,56.19 cw(c2352.14,22.86) 2352.14,70 cw(c2352.14,117.14) P16.1@2318.81,83.81 ; P17.1@2391.19,56.19 ccw(c2357.86,22.86) 2357.86,70 ccw(c2357.86,117.14) P17.1@2391.19,83.81 ; P17.1@2405,50.47 cw(c2405,-41.27) 2469.87,23.6 ; P17.1@2405,70.47 cw(c2405,27.02) 2435.73,57.74 ; 2528.51,666.49 ccw(c2582.65,720.63) C28.2@2598.87,645.8 ; v1@2540,926 2540,855.71 2513.41,829.12 ; 2554.43,640.57 ccw(c2591.88,678.02) C28.2@2603.1,626.25 ; C28.2@2574.06,620.94 2513.41,681.59 2513.41,829.12 ; C28.2@2602.02,602.96 cw(c2558.6,559.54) 2620,559.54 cw(c2681.4,559.54) C28.2@2637.98,602.96 ; C28.2@2620,620.94 2620,542 2669,493 3032.06,493 C30.2@3140,600.94 ; P14.1@2910.47,70 cw(c2863.33,70) 2896.66,36.66 cw(c2930,3.33) P14.1@2930,50.47 ; P14.1@2916.19,83.81 ccw(c2882.86,117.14) 2930,117.14 ccw(c2977.14,117.14) 2943.81,83.81 ccw(c2977.14,117.14) 2977.14,70 ccw(c2977.14,22.86) P14.1@2943.81,56.19 ; P8.1@2916.19,156.19 cw(c2882.86,122.86) 2930,122.86 cw(c2977.14,122.86) P8.1@2943.81,156.19 ; P8.1@2930,170 P14.1@2930,70 ; P14.1@2955.64,70 ccw(c2955.64,161.18) TFT1.0@3044.08,139.02 ; 2981.26,70 ccw(c2981.26,154.76) TFT1.0@3063.48,134.16 ; 3003.47,70 cw(c3003.47,3.47) TFT1.0@3050.51,50.51 ; 3006.89,70 ccw(c3006.89,148.34) TFT1.0@3082.88,129.3 ; TFT1.0@3024.68,143.88 cw(c2930.01,167.6) P14.1@2930,70 ; 3069.7,530.64 ccw(c2999.4,600.94) C30.2@3098.82,600.94 ; TFT1.0@3070,70 P14.1@2930,70 ; TFT1.0@3080,160 TFT1.0@3120,120 ; 3103.84,564.79 ccw(c3067.68,600.94) C30.2@3118.82,600.94 ; C30.2@3107.72,568.66 cw(c3124.25,552.13) C30.2@3124.25,575.51 ; P12.1@3410,1620 3457,1667 3886,1667 3908,1645 3908,1572 P15.9@3960,1520 ; P12.1@3410,1639.53 ccw(c3410,1686.67) 3443.34,1653.34 ccw(c3476.67,1620) P12.1@3429.53,1620 ; P2.1@3619.66,1298.05 ccw(c3601.51,1332) 3640,1332 ; P2.1@3640,1260 3640,1332 ; P2.1@3660.34,1298.05 cw(c3678.49,1332) 3640,1332 ; C26.1@3848,1384.69 3848,1440 ; 3848,1405.11 ccw(c3873.81,1405.11) C26.1@3855.56,1386.86 ; P15.9@3940.47,1520 ccw(c3893.33,1520) 3926.66,1553.34 ccw(c3960,1586.67) P15.9@3960,1539.53 ; 3957,1440 3748,1440 3640,1332
  Bottom Layer w25: BEEP1.2@600,1040 685,1040 700.06,1050.06 720,1070 724.88,1079.88 ; BEEP1.2@607.86,1032.14 cw(c626.85,1013.15) 626.85,1040 cw(c626.85,1066.85) BEEP1.2@607.86,1047.86 ; 703.99,1052.69 ccw(c692.82,1069.42) v1@712.55,1065.49 ; v1@713.23,1066.77 ccw(c685.11,1094.89) SDCARD.G1@724.88,1094.89 ; SDCARD.G1@714.4,1104.62 cw(c690.45,1079.88) 724.88,1079.88 ; SDCARD.G1@724.88,1119.37 724.88,1079.88 ; SDCARD.G1@735.36,1104.62 ccw(c759.31,1079.88) 724.88,1079.88
  Bottom Layer w30: TFT1.0@475,1560 579,1456 ; TFT1.0@506.54,1472.23 cw(c529.98,1406.98) 579,1456 ; TFT1.0@562.77,1528.46 ccw(c628.02,1505.02) 579,1456 ; 684.43,1449 cw(c732.76,1400.68) SDCARD.G3@732.76,1469.02 ; SDCARD.G3@720.24,1482.58 cw(c691.43,1484.9) 691.43,1456 ; SDCARD.G3@732.76,1497.32 691.43,1456 ; v1(2949,1033) 3415,1033 ; 579,1456 691.43,1456
  Bottom Layer w40: TFT1.0@485,1648 488,1645 1529.57,1645 USB1.5@1554.57,1620 1582.57,1648 1812,1648 USB1.5@1840,1620 ; SDCARD.G2@1342.99,1497.32 1585.83,1497.32 USB1.5@1601.81,1513.31 USB1.5@1792.76,1513.31 ; 1494.97,1645 cw(c1494.97,1570.25) USB1.5@1547.83,1623.11 ; USB1.5@1561.3,1623.11 cw(c1621.4,1563.01) 1621.4,1648 ; 1582.99,1497.32 ccw(c1582.99,1528.19) USB1.5@1604.82,1506.36 ; 1773.16,1648 cw(c1773.16,1563.01) USB1.5@1833.26,1623.11 ; P21.1@2250,1420 P19.1@2250,1620 ; P18.1@2250,1520 2670,1520 ; P9.1@2680,1420 P1.1@2680,1620 TFT1.0@3060,1620 ; 2762.05,1620 cw(c2762.05,1202.05) TFT1.0@3057.59,1497.59 ; 2858.62,1620 cw(c2858.62,1298.62) TFT1.0@3085.87,1525.87 ; 2955.19,1620 cw(c2955.19,1395.19) TFT1.0@3114.15,1554.15 ; v1(3019,973) 3138.37,973 v1(3168.37,943) ; TFT1.0@3126.7,1555.16 cw(c3253.52,1463.56) 3253.52,1620 ; C30.2@3140,600.94 3311.94,600.94 R37.2@3416,705 ; TFT1.0@3159.13,1531.74 cw(c3331.76,1407.05) P6.1@3331.76,1620 ; C30.2@3166.66,590.03 cw(c3193.01,563.69) 3193.01,600.94 cw(c3193.01,638.2) C30.2@3166.66,611.86 ; TFT1.0@3180,1620 P12.1@3410,1620 ccw(c3409.99,1350.54) TFT1.0@3191.55,1508.32 ; 3346.2,635.2 ccw(c3294.36,687.05) R37.2@3367.68,687.05
  Bottom Layer w45: TFT1.0@3059.35,180.65 ccw(c2912.94,327.06) 3120,327.06 ccw(c3327.06,327.06) TFT1.0@3180.65,180.65 ; TFT1.0@3120,120 3120,336 v8(3145,361) ; 3120,288.57 cw(c3217.43,288.57) v8@3148.54,357.46
  Bottom Layer w80: R37.2@3416,705 3416,1121 3555,1260 P2.1@3640,1260 ; 3472.45,1177.45 cw(c3640,1009.9) P2.1@3640,1246.85 ; 3512.5,1217.5 cw(c3598.84,1131.16) P2.1@3636,1247.47
  other v1: 3019,1033 2949,1088 3019,1088
  other v3: 1299.68,1495
GND/CAP1: C12.2 U3.49 | length 185.6
  Top Layer w10: U3.49@1706.08,906.08 1757.16,855 1784.68,855 C12.2@1809.68,880 ; 1785.29,855.6 cw(c1809.68,831.21) C12.2@1809.68,865.71 ; 1787.66,857.98 ccw(c1766.63,879.02) C12.2@1796.38,879.02
GND/CAP2: C13.2 U3.73 | length 289.5
  Top Layer w10: C13.2@1360.32,1495 1407,1495 1460,1442 1460,1392.16 U3.73@1413.77,1345.93 U3.73@1415.93,1345.93 ; C13.2@1369.72,1485.59 cw(c1392.44,1462.87) 1392.44,1495 cw(c1392.44,1527.13) C13.2@1369.72,1504.41
GND/VCC3V3: R18.2 R19.2 U3.19 | length 550.1
  Top Layer w10: v15@1127.79,579.21 ccw(c1112.8,594.2) 1134,594.2 ccw(c1155.2,594.2) v15@1140.21,579.21 ; v15(1134,573) 1134,620.74 U3.19@1182.71,669.45
  Bottom Layer w10: v15@1127.79,579.21 ccw(c1112.8,594.2) 1134,594.2 ccw(c1155.2,594.2) v15@1140.21,579.21 ; v15@1134,569.57 cw(c1191.57,569.57) R19.2@1161.07,618.4 ; v15(1134,573) 1134,608.68 R19.2@1155,629.68 R18.2@1215,629.68 ; 1134,587.61 cw(c1180.3,587.61) R19.2@1155.77,626.88 ; 1134,605.65 cw(c1169.03,605.65) R19.2@1150.47,635.36 ; R19.2@1165.39,620.28 cw(c1188.11,597.56) 1188.11,629.68 cw(c1188.11,661.81) R19.2@1165.39,639.09 ; R18.2@1204.61,620.28 ccw(c1181.89,597.56) 1181.89,629.68 ccw(c1181.89,661.81) R18.2@1204.61,639.09